# Altium PCB HOST.PcbDoc (part 2 of 2)
Units mil, origin at the board's own origin, x right, y up, seen from the top; angles counter-clockwise.
Board outline 6000 x 4000 mil, 2 copper layers (Top Layer, Bottom Layer); 110 components, 88 nets, 329 pads, 175 vias.
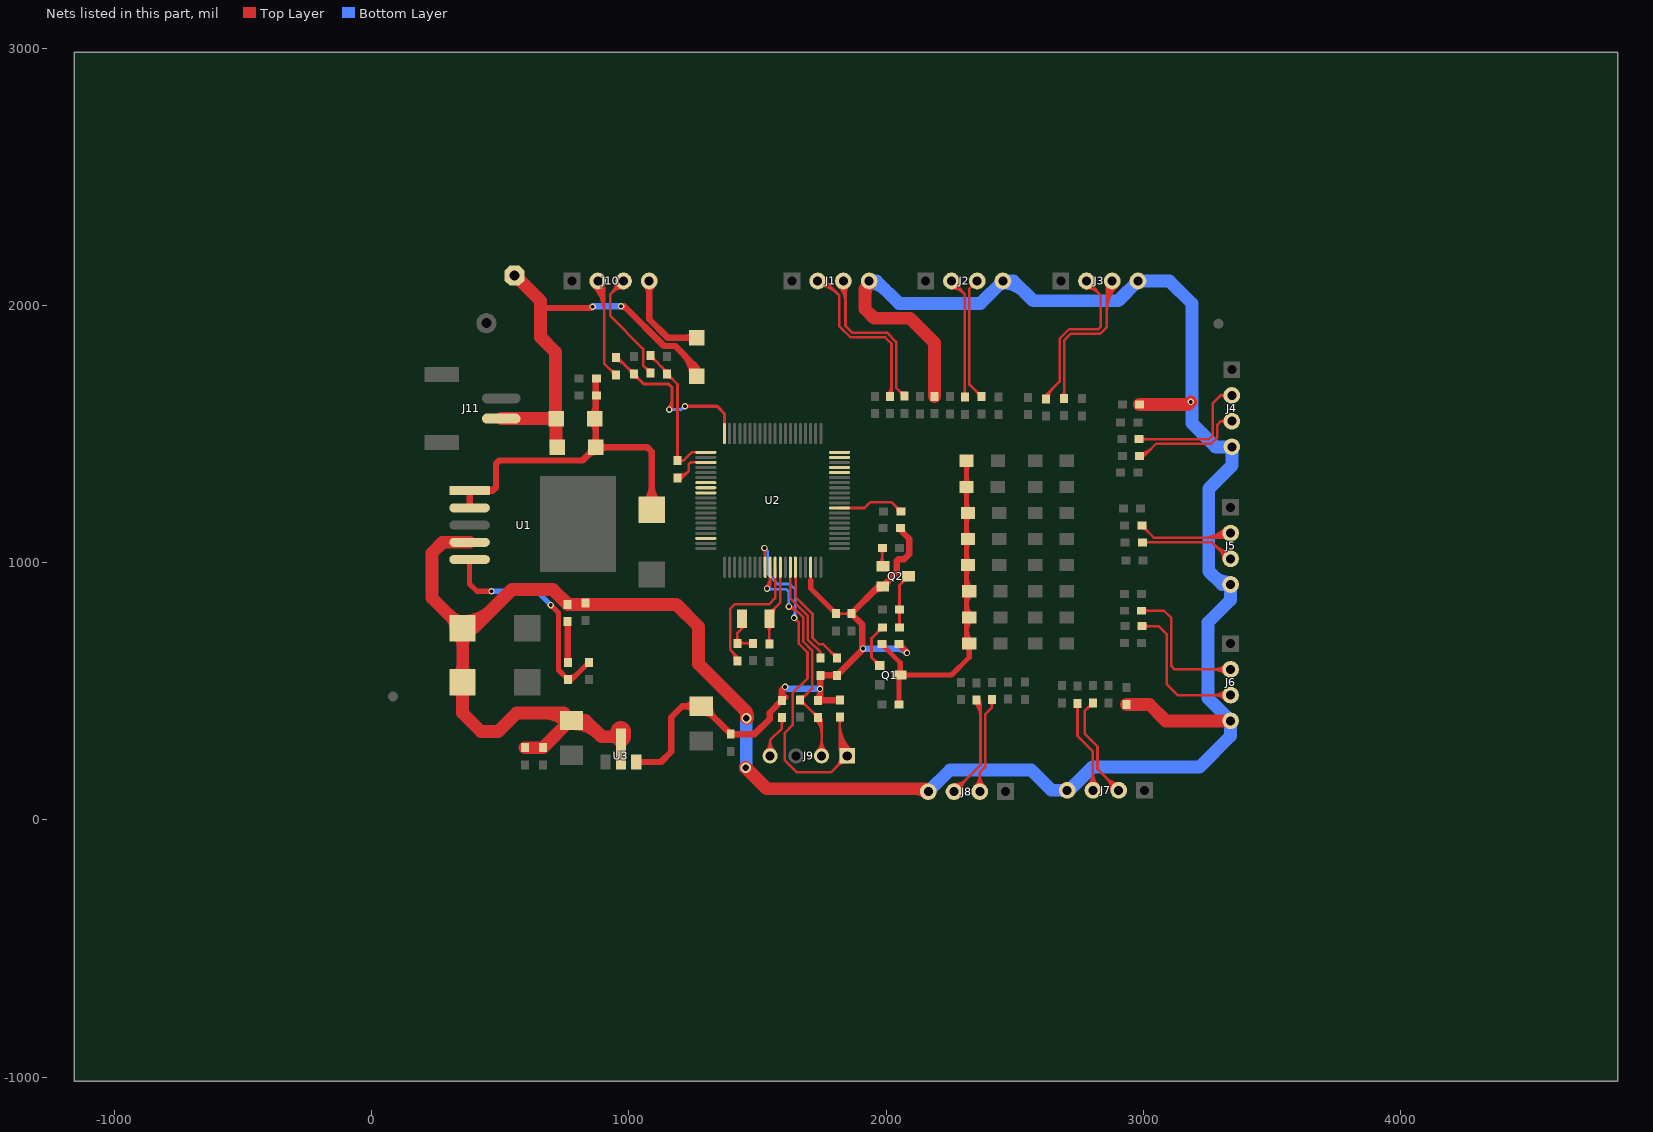
[diagram p2: the nets of this part, all layers, seen from the top]

## Via types
v1: diameter 25, hole 15, Top Layer to Bottom Layer, tented both sides, 173 vias
v2: diameter 40, hole 25, Top Layer to Bottom Layer, tented both sides, 2 vias

## Nets (pads, with @x,y where several pads share a name; then routed paths per layer and width w, separated by ;. In a path a pad name is that pad's centre, name@x,y a point inside that pad or via, vN(x,y) a via of type N, cw(c..) or ccw(c..) an arc to the next point about the centre after c; other vN are vias at no path point) (continued)
M_RXD: C27.2 R20.2 R28.1 U2.61 | length 793.3
  Top Layer w10: R28.1@1084,1792.5 cw(c1084,1762.32) 1105.34,1783.66 ; R28.1@1084,1805 1149,1740 C27.2@1149,1733.49 1189,1693.49 1189,1616 ; R28.1@1094.5,1803 ccw(c1115.02,1803) 1100.51,1788.49 ; 1127.89,1761.11 cw(c1102.27,1735.49) C27.2@1138.5,1735.49 ; C27.2@1138.77,1750.23 ccw(c1149,1760.45) C27.2@1149,1745.99 ; C27.2@1149,1720.99 cw(c1149,1690.81) 1170.34,1712.15 ; C27.2@1159.5,1731.49 ccw(c1180.02,1731.49) 1165.51,1716.98 ; R20.2@1181.58,1406.42 ccw(c1163.65,1424.35) 1189,1424.35 ccw(c1214.35,1424.35) R20.2@1196.42,1406.42 ; 1189,1641 1189,1616 ; R20.2@1196.93,1390.12 cw(c1212,1377.06) 1212,1397 ; R20.2@1196.93,1403.88 ccw(c1212,1416.94) 1212,1397 ; U2.61@1299.16,1429.01 1244.01,1429.01 1212,1397 ; 1189,1616 R20.2@1189,1397 1212,1397
M_TXD: C28.2 R29.2 U2.60 | length 903.4
  Top Layer w12: R29.2@949,1785.5 cw(c949,1742.07) 979.71,1772.78 ; R29.2@949,1797 955.49,1797 C28.2@1019,1733.49 1058.49,1694 1155,1694 1168,1681 1168,1606 v1(1157,1595) ; 999.37,1753.12 ccw(c1019,1772.75) C28.2@1019,1744.99 ; C28.2@1004.2,1748.29 cw(c991.39,1735.49) C28.2@1009.5,1735.49 ; C28.2@1019,1721.99 cw(c1019,1694.23) 1038.63,1713.86 ; C28.2@1028.5,1731.49 ccw(c1046.61,1731.49) C28.2@1033.8,1718.69 ; v1@1152.4,1599.6 ccw(c1114.75,1637.25) 1168,1637.25 ; v1@1160.89,1591.11 ccw(c1143.72,1608.28) 1168,1608.28 ; v1(1218,1608) 1343,1608 1371.97,1579.03 U2.60@1371.99,1501.84 ; v1@1222.6,1603.4 cw(c1233.69,1592.31) 1233.69,1608 cw(c1233.69,1623.69) v1@1222.6,1612.6
  Bottom Layer w12: v1(1157,1595) 1201,1595 1214,1608 v1(1218,1608) ; v1@1161.6,1590.4 cw(c1172.69,1579.31) 1172.69,1595 cw(c1172.69,1610.69) v1@1161.6,1599.6 ; 1200.08,1594.08 cw(c1218,1576.15) v1@1218,1601.5
MOTO_K1: U2.39
MOTO_POW: U2.40
NetC20_1: C20.1 C21.2 C22.2 F1.2 F2.2 U1.1 U1.2 | length 2166.8
  Top Layer w25: U1.2@380.82,1212.93 U1.1@380.82,1279.86 470.86,1279.86 483.49,1292.49 ; U1.1@443.85,1284.67 ccw(c457.84,1318.14) 483.49,1292.49 ; F1.2@853.5,1448 cw(c811.25,1448) 841.13,1418.13 cw(c871,1388.25) F1.2@871,1430.5 ; F2.2@854.63,1572.37 ccw(c815.09,1611.91) 871,1611.91 ; F2.2@867,1560 871,1556 F1.2@871,1448 ; 871,1592.59 ccw(c899.59,1592.59) F2.2@879.37,1572.37 ; C21.2@873.51,1715 871,1712.49 F1.2@871,1448 ; F1.2@883.37,1435.63 cw(c913.25,1405.75) 913.25,1448 cw(c913.25,1490.25) F1.2@883.37,1460.37 ; C20.1@1061.65,1233.34 ccw(c995.62,1299.37) 1089,1299.37 ccw(c1182.38,1299.37) C20.1@1116.35,1233.34 ; C20.1@1089,1205.98 1089,1431 1072,1448 F1.2@871,1448 ; 483.49,1292.49 483.49,1385 495.49,1397 820,1397 F1.2@871,1448 ; 871,1490.25 ccw(c913.25,1490.25) F1.2@883.37,1460.37 ; 871,1490.25 cw(c828.75,1490.25) 858.63,1460.37 ccw(c828.75,1490.25) 871,1490.25 ; 871,1490.25 ccw(c913.25,1490.25) F1.2@883.37,1460.37 ; F2.2@854.63,1547.63 cw(c815.09,1508.09) 871,1508.09 ccw(c815.09,1508.09) F2.2@854.63,1547.63 ; 871,1527.41 cw(c899.59,1527.41) 879.37,1547.63 ccw(c899.59,1527.41) 871,1527.41
NetC23_2: C23.2 R22.1 Y1.2 | length 304.7
  Top Layer w10: R22.1@1414.58,694.42 ccw(c1396.65,712.35) 1422,712.35 ccw(c1447.35,712.35) 1429.42,694.42 ccw(c1448.53,713.53) 1448.53,686.51 ; R22.1@1429.42,679.58 cw(c1446.16,662.84) 1446.16,686.51 ; Y1.2@1434.33,752.58 cw(c1431.23,744.7) 1439.7,744.7 ; Y1.2@1439.7,782 1439.7,744.7 ; Y1.2@1445.07,752.58 ccw(c1448.17,744.7) 1439.7,744.7 ; C23.2@1474.58,679.08 ccw(c1456.65,661.16) 1456.65,686.51 ccw(c1456.65,711.86) C23.2@1474.58,693.93 ; C23.2@1482,686.51 1423.51,686.51 R22.1@1422,685 1422,727 1439.7,744.7
NetC39_2: C39.2 D9.2 D10.2 D11.2 D12.2 D13.2 D14.2 D15.2 D16.2 Q1.C R31.2 | length 2154.2
  Top Layer w20: R31.2@1983,683 2055,611 Q1.C@2055,563 ; R31.2@1990.5,683 ccw(c2008.61,683) R31.2@1995.8,670.2 ; Q1.C@2042.34,557.34 cw(c2022.63,537.63) 2050.51,537.63 ; Q1.C@2049.34,568.66 ccw(c2035.69,582.31) 2055,582.31 ccw(c2074.31,582.31) Q1.C@2060.66,568.66 ; C39.2@2050.51,449 2050.51,558.51 Q1.C@2055,563 ; Q1.C@2067.66,557.34 cw(c2081.31,543.69) 2081.31,563 cw(c2081.31,582.31) Q1.C@2067.66,568.66 ; D10.2@2302.32,1284.94 cw(c2276.65,1259.27) 2312.95,1259.27 ; D10.2@2302.32,1304.2 ccw(c2276.65,1329.87) 2312.95,1329.87 ; D9.2@2303.32,1386.37 cw(c2280.07,1363.11) 2312.95,1363.11 cw(c2345.84,1363.11) D9.2@2322.59,1386.37 ; D13.2@2304.38,980.65 cw(c2283.7,959.97) 2312.95,959.97 ; D13.2@2304.38,999.92 ccw(c2283.7,1020.61) 2312.95,1020.61 ; D12.2@2304.38,1082.08 cw(c2283.7,1061.39) 2312.95,1061.39 ; D12.2@2304.38,1101.35 ccw(c2283.7,1122.03) 2312.95,1122.03 ; D11.2@2304.38,1183.51 cw(c2283.7,1162.82) 2312.95,1162.82 ; D11.2@2304.38,1202.77 ccw(c2283.7,1223.46) 2312.95,1223.46 ; 2312.95,733.52 ccw(c2366.54,733.52) D16.2@2328.65,695.63 ; 2312.95,739.9 cw(c2366.54,739.9) D15.2@2328.65,777.8 ; 2312.95,834.95 ccw(c2366.54,834.95) D15.2@2328.65,797.06 ; 2312.95,841.33 cw(c2366.54,841.33) D14.2@2328.65,879.22 ; 2312.95,936.38 ccw(c2366.54,936.38) D14.2@2328.65,898.49 ; 2312.95,954.83 cw(c2349.47,954.83) D13.2@2323.65,980.65 ; 2312.95,1025.74 ccw(c2349.47,1025.74) D13.2@2323.65,999.92 ; 2312.95,1056.26 cw(c2349.47,1056.26) D12.2@2323.65,1082.08 ; 2312.95,1127.17 ccw(c2349.47,1127.17) D12.2@2323.65,1101.35 ; 2312.95,1157.69 cw(c2349.47,1157.69) D11.2@2323.65,1183.51 ; 2312.95,1228.6 ccw(c2349.47,1228.6) D11.2@2323.65,1202.77 ; 2312.95,1264.1 cw(c2342.43,1264.1) D10.2@2321.59,1284.94 ; 2312.95,1325.04 ccw(c2342.43,1325.04) D10.2@2321.59,1304.2 ; D9.2@2312.95,1396 2312.95,1193.14 2312.95,696 D16.2@2322.95,686 2322.95,631.95 2254,563 Q1.C@2055,563 ; D16.2@2313.32,676.37 cw(c2290.07,653.11) 2322.95,653.11 cw(c2355.84,653.11) D16.2@2332.59,676.37
NetF3_1: F3.1 J10.4 | length 505.6
  Top Layer w25: J10.4@1064.86,2080.86 cw(c1030.72,2046.72) 1079,2046.72 cw(c1127.28,2046.72) J10.4@1093.14,2080.86 ; J10.4@1079,2095 1079,1946 1150,1875 F3.1@1264,1875 ; F3.1@1251.63,1862.63 ccw(c1221.75,1832.75) 1221.75,1875 ccw(c1221.75,1917.25) F3.1@1251.63,1887.37
NetJ1_2: J1.2 R3.1 | length 922.1
  Top Layer w10: J1.2@1734,2077.5 cw(c1734,1967.65) 1811.67,2045.33 ; J1.2@1734,2087.5 cw(c1734,2001.8) 1794.6,2062.4 ; J1.2@1734,2095 1762,2095 1818,2039 1818,1918.83 1860.63,1876.2 1996,1876.2 2021,1851.2 R3.1@2021,1646 ; J1.2@1734,2097.5 cw(c1734,2035.94) 1777.53,2079.47 ; R3.1@2006.91,1655.42 ccw(c1972.89,1689.44) 2021,1689.44 ; R3.1@2013.98,1648.35 ccw(c1997.03,1665.3) 2021,1665.3
NetJ1_3: J1.3 R1.2 | length 890.2
  Top Layer w10: J1.3@1814.55,2075.55 cw(c1748.3,2009.3) 1842,2009.3 ; J1.3@1821.63,2082.63 cw(c1772.44,2033.44) 1842,2033.44 ; J1.3@1828.7,2089.7 cw(c1796.58,2057.58) 1842,2057.58 ; J1.3@1834,2095 1842,2087 1842,1942 ; 1842,1972 1842,1942 ; 1842,2047.92 cw(c1881.08,2047.92) J1.3@1853.45,2075.55 ; 2050.33,1668.34 ccw(c2071.67,1689.68) R1.2@2071.67,1659.5 ; 2055.16,1663.51 cw(c2040.65,1649) R1.2@2061.17,1649 ; R1.2@2071.67,1647 2038.8,1679.87 2038.8,1858.57 2003.37,1894 1868,1894 1842,1920 1842,1942
NetJ2_2: J2.2 R4.1 | length 684
  Top Layer w10: J2.2@2254,2067.5 cw(c2254,2001.11) 2300.95,2048.05 cw(c2347.89,2095) J2.2@2281.5,2095 ; J2.2@2254,2077.5 cw(c2254,2035.25) 2283.87,2065.13 cw(c2313.75,2095) J2.2@2271.5,2095 ; J2.2@2254,2095 2306,2043 R4.1@2306,1643 ; R4.1@2298.58,1652.42 ccw(c2280.65,1670.35) 2306,1670.35 ccw(c2331.35,1670.35) R4.1@2313.42,1652.42
NetJ2_3: J2.3 R2.2 | length 521.9
  Top Layer w10: 2349.66,1666.34 ccw(c2371,1687.68) R2.2@2371,1657.5 ; J2.3@2354,2095 2323.8,2064.8 2323.8,1733 2323.8,1692.2 R2.2@2371,1645 ; 2354.49,1661.51 cw(c2339.98,1647) R2.2@2360.5,1647
NetJ3_2: J3.2 R7.1 | length 876.5
  Top Layer w10: R7.1@2622,1637 2622,1652 2674.2,1704.2 2674.2,1870.37 2711.93,1908.1 2825.1,1908.1 2835,1918 2835,2039 J3.2@2779,2095 ; R7.1@2622.5,1639 cw(c2655.09,1639) 2632.05,1662.05 ; R7.1@2632.5,1639 cw(c2689.23,1639) 2649.12,1679.12 ; J3.2@2779,2067.5 cw(c2779,2001.11) 2825.95,2048.05 cw(c2872.89,2095) J3.2@2806.5,2095 ; J3.2@2779,2077.5 cw(c2779,2035.25) 2808.87,2065.13 cw(c2838.75,2095) J3.2@2796.5,2095
NetJ3_3: J3.3 R5.2 | length 959.6
  Top Layer w10: R5.2@2684.58,1648.42 ccw(c2666.65,1666.35) 2692,1666.35 ccw(c2717.35,1666.35) R5.2@2699.42,1648.42 ; R5.2@2692,1639 2692,1863 2719.3,1890.3 2832.47,1890.3 2858,1915.83 2858,2074 J3.3@2879,2095 ; 2858,1977.91 cw(c2996.09,1977.91) J3.3@2898.45,2075.55 ; 2858,2002.05 cw(c2971.95,2002.05) J3.3@2891.37,2082.63 ; 2858,2026.19 cw(c2947.81,2026.19) J3.3@2884.3,2089.7 ; 2858,2050.34 cw(c2923.66,2050.34) J3.3@2877.23,2096.77
NetJ4_2: J4.2 R8.1 | length 593
  Top Layer w10: R8.1@2983,1480 3256,1480 3270,1494 3270,1620 3300,1650 ; R8.1@2992.42,1472.58 cw(c3010.35,1454.65) 3010.35,1480 cw(c3010.35,1505.35) R8.1@2992.42,1487.42 ; J4.2@3319.28,1637.95 ccw(c3300,1628.55) 3300,1650 ; J4.2@3319.28,1662.05 cw(c3300,1671.45) 3300,1650 ; J4.2@3344,1650 3300,1650
NetJ4_3: J4.3 R6.2 | length 582.6
  Top Layer w10: R6.2@2985,1415 3002.8,1415 ; R6.2@2987,1415.5 ccw(c2987,1454.85) 3014.83,1427.03 ; R6.2@2987,1425.5 ccw(c2987,1488.99) 3031.9,1444.1 ; R6.2@2996.68,1410.93 cw(c3002.8,1408.36) 3002.8,1415 ; R6.2@2996.68,1419.07 ccw(c3002.8,1421.64) 3002.8,1415 ; J4.3@3318.79,1539 ccw(c3302,1531.68) 3302,1550 ; J4.3@3318.79,1561 cw(c3302,1568.32) 3302,1550 ; J4.3@3344,1550 3302,1550 ; 3002.8,1415 3050,1462.2 3263.37,1462.2 3287.8,1486.63 3287.8,1535.8 3302,1550
NetJ5_2: J5.2 R11.1 | length 701.9
  Top Layer w10: R11.1@2994,1144 3041.2,1096.8 3320.8,1096.8 J5.2@3339,1115 ; R11.1@2996,1133.5 cw(c2996,1112.98) 3010.51,1127.49 ; R11.1@3006.5,1144 ccw(c3036.68,1144) 3015.34,1122.66 ; 3228.67,1096.8 ccw(c3228.67,1225.33) J5.2@3319.55,1134.45 ; 3252.81,1096.8 ccw(c3252.81,1201.19) J5.2@3326.63,1127.37 ; 3276.95,1096.8 ccw(c3276.95,1177.05) J5.2@3333.7,1120.3 ; 3301.1,1096.8 ccw(c3301.1,1152.9) J5.2@3340.77,1113.23
NetJ5_3: J5.3 R9.2 | length 562
  Top Layer w10: R9.2@2996,1079 3267,1079 3331,1015 J5.3@3339,1015 ; R9.2@3005.42,1071.58 cw(c3023.35,1053.65) 3023.35,1079 cw(c3023.35,1104.35) R9.2@3005.42,1086.42 ; 3278.4,1067.6 ccw(c3339,1128.2) J5.3@3339,1042.5 ; 3295.47,1050.53 ccw(c3339,1094.06) J5.3@3339,1032.5 ; 3297.71,1048.29 cw(c3264.42,1015) J5.3@3311.5,1015
NetJ6_2: J6.2 R12.1 | length 760
  Top Layer w10: R12.1@2993,813 3080,813 3108.8,784.2 3108.8,598 3121.8,585 J6.2@3339,585 ; R12.1@3002.42,805.58 cw(c3020.35,787.65) 3020.35,813 cw(c3020.35,838.35) R12.1@3002.42,820.42 ; J6.2@3319.55,565.55 ccw(c3272.61,518.61) 3272.61,585 ccw(c3272.61,651.39) J6.2@3319.55,604.45 ; J6.2@3326.63,572.63 ccw(c3296.75,542.75) 3296.75,585 ccw(c3296.75,627.25) J6.2@3326.63,597.37
NetJ6_3: J6.3 R10.2 | length 779.1
  Top Layer w10: R10.2@2995,753 3059,753 3091,721 3091,527 3133,485 J6.3@3339,485 ; R10.2@3004.42,745.58 cw(c3022.35,727.65) 3022.35,753 cw(c3022.35,778.35) R10.2@3004.42,760.42 ; J6.3@3319.55,465.55 ccw(c3272.61,418.61) 3272.61,485 ccw(c3272.61,551.39) J6.3@3319.55,504.45 ; J6.3@3326.63,472.63 ccw(c3296.75,442.75) 3296.75,485 ccw(c3296.75,527.25) J6.3@3326.63,497.37
NetJ7_2: J7.2 R15.1 | length 618.4
  Top Layer w10: 2782.66,433.66 cw(c2804,412.32) R15.1@2804,442.5 ; 2787.49,438.49 ccw(c2772.98,453) R15.1@2793.5,453 ; R15.1@2804,455 2772,423 2772,334.97 2821.8,285.17 2821.8,197.2 J7.2@2904,115 ; J7.2@2876.5,115 ccw(c2810.11,115) 2857.05,161.95 ccw(c2904,208.89) J7.2@2904,142.5 ; J7.2@2886.5,115 ccw(c2844.25,115) 2874.13,144.87 ccw(c2904,174.75) J7.2@2904,132.5
NetJ7_3: J7.3 R13.2 | length 574.7
  Top Layer w10: R13.2@2736.58,443.58 cw(c2718.65,425.65) 2744,425.65 cw(c2769.35,425.65) R13.2@2751.42,443.58 ; R13.2@2745,452 R13.2@2744,453 2744,326 2804,266 J7.3@2804,115 ; J7.3@2784.55,134.45 ccw(c2737.61,181.39) 2804,181.39 ccw(c2870.39,181.39) J7.3@2823.45,134.45 ; J7.3@2791.63,127.37 ccw(c2761.75,157.25) 2804,157.25 ccw(c2846.25,157.25) J7.3@2816.37,127.37
NetJ8_2: J8.2 R16.1 | length 587.9
  Top Layer w10: J8.2@2344.55,129.45 ccw(c2297.61,176.39) 2364,176.39 ccw(c2430.39,176.39) J8.2@2383.45,129.45 ; J8.2@2351.63,122.37 ccw(c2321.75,152.25) 2364,152.25 ccw(c2406.25,152.25) J8.2@2376.37,122.37 ; J8.2@2364,110 2364,184.83 2384.8,205.63 2384.8,409.8 2411,436 R16.1@2411,468 ; R16.1@2403.58,458.58 cw(c2385.65,440.65) 2411,440.65 cw(c2436.35,440.65) R16.1@2418.42,458.58
NetJ8_3: J8.3 R14.2 | length 740
  Top Layer w10: J8.3@2264,110 2367,213 2367,450 R14.2@2351,466 ; J8.3@2264,127.5 ccw(c2264,169.75) 2293.87,139.87 ccw(c2323.75,110) J8.3@2281.5,110 ; J8.3@2264,137.5 ccw(c2264,203.89) 2310.95,156.95 ccw(c2357.89,110) J8.3@2291.5,110 ; R14.2@2343.58,456.58 cw(c2287.02,400.02) 2367,400.02 ; R14.2@2350.65,463.65 cw(c2311.17,424.17) 2367,424.17 ; R14.2@2352.92,453.68 cw(c2356.02,437.02) 2368,449 ; R14.2@2357.72,470.72 cw(c2335.31,448.31) 2367,448.31 ; R14.2@2361.5,464 ccw(c2382.02,464) 2367.51,449.49
NetJ9_4: J9.4 R27.2 | length 356
  Top Layer w10: J9.4@1531.66,266.34 ccw(c1489.79,308.21) 1549,308.21 ccw(c1608.21,308.21) J9.4@1566.34,266.34 ; J9.4@1538.73,259.27 ccw(c1513.93,284.07) 1549,284.07 ccw(c1584.07,284.07) J9.4@1559.27,259.27 ; J9.4@1549,249 1549,310 1595,356 R27.2@1595,398 ; R27.2@1587.58,388.58 cw(c1569.65,370.65) 1595,370.65 cw(c1620.35,370.65) R27.2@1602.42,388.58
NetJ10_2: J10.2 R29.1 | length 840.1
  Top Layer w10: J10.2@859.55,2075.55 cw(c752.25,1968.25) 904,1968.25 ; J10.2@866.63,2082.63 cw(c776.4,1992.4) 904,1992.4 ; J10.2@873.7,2089.7 cw(c800.54,2016.54) 904,2016.54 ; J10.2@879,2095 904,2070 904,1775 R29.1@949,1730 ; J10.2@880.77,2096.77 cw(c824.68,2040.68) 904,2040.68 ; J10.2@887.84,2103.84 cw(c848.82,2064.82) 904,2064.82 ; 927.66,1751.34 ccw(c949,1772.68) R29.1@949,1742.5 ; 932.49,1746.51 cw(c917.98,1732) R29.1@938.5,1732
NetJ10_3: J10.3 R28.2 | length 653.2
  Top Layer w10: J10.3@951.5,2095 cw(c885.11,2095) 932.05,2048.05 cw(c979,2001.11) J10.3@979,2067.5 ; J10.3@961.5,2095 cw(c919.25,2095) 949.13,2065.13 cw(c979,2035.25) J10.3@979,2077.5 ; J10.3@979,2095 928,2044 928,1959 1055.7,1831.3 1055.7,1766.3 R28.2@1084,1738 ; 1062.66,1759.34 ccw(c1084,1780.68) R28.2@1084,1750.5 ; 1067.49,1754.51 cw(c1052.98,1740) R28.2@1073.5,1740
NetQ1_B: Q1.B R32.1 | length 267.8
  Top Layer w10: Q1.B@1962,600 ccw(c1930.62,600) 1952.81,622.19 ccw(c1975,644.38) Q1.B@1975,613 ; 1963.66,726.66 ccw(c1942.32,748) R32.1@1972.5,748 ; 1968.49,731.49 cw(c1983,716.98) R32.1@1983,737.5 ; Q1.B@1975,600 1943,632 1943,706 R32.1@1985,748
NetQ2_2: Q2.2 R34.2 | length 168.5
  Top Layer w10: Q2.2@1972.19,996.97 ccw(c1941.28,1027.88) 1985,1027.88 ; R34.2@1977.58,1049.58 cw(c1959.65,1031.65) 1985,1031.65 cw(c2010.35,1031.65) R34.2@1992.42,1049.58 ; 1985,1017.26 ccw(c2013.7,1017.26) Q2.2@1993.41,996.97 ; R34.2@1985,1057 1985,989.16 Q2.2@1987.8,986.36
NetQ2_3: Q2.3 R32.2 R33.2 | length 387.2
  Top Layer w10: R32.2@2044.58,755.42 ccw(c2026.65,773.35) 2052,773.35 ccw(c2077.35,773.35) R32.2@2059.42,755.42 ; R33.2@2044.58,810.58 cw(c2026.65,792.65) 2052,792.65 cw(c2077.35,792.65) R33.2@2059.42,810.58 ; R33.2@2044.58,825.42 ccw(c2026.65,843.35) 2052,843.35 ccw(c2077.35,843.35) R33.2@2059.42,825.42 ; R32.2@2052,748 R33.2@2052,818 2052,912 Q2.3@2087,947 ; 2054.5,914.5 ccw(c2024.22,944.78) Q2.3@2067.01,946.42 ; 2064.93,924.93 cw(c2082,907.86) Q2.3@2082,932
NetR18_1: R18.1 R36.2 | length 159.8
  Top Layer w25: R18.1@762,771 762,614 R36.2@764,612
NetR19_2: R19.2 R36.1 U1.5 | length 966.7
  Top Layer w20: U1.5@375.36,1006.69 cw(c362.19,993.51) 380.82,993.51 cw(c399.45,993.51) U1.5@386.28,1006.69 ; U1.5@380.82,1012.14 380.82,917.18 409,889 v1(466,889) ; v1(696,835) 726,805 726,583 R36.1@764,545 777,545 R19.2@844,612 ; R36.1@751.2,557.8 ccw(c764,570.61) 764,552.5 ccw(c764,601.99) 799,567 ; R19.2@831.2,599.2 cw(c844,586.39) R19.2@844,604.5
  Bottom Layer w20: v1(466,889) 642,889 v1(696,835)
NetR20_1: R20.1 U2.63 | length 268.6
  Top Layer w10: R20.1@1187.24,1322.66 ccw(c1190.97,1342.46) 1205.22,1328.22 ; R20.1@1189,1330 1207,1330 ; R20.1@1189.09,1332.49 ccw(c1195.22,1365) 1218.61,1341.61 ; R20.1@1190.94,1342.32 ccw(c1199.46,1387.53) 1232,1355 ; R20.1@1198.14,1324.83 cw(c1207,1319.82) 1207,1330 ; R20.1@1198.14,1335.17 ccw(c1207,1340.18) 1207,1330 ; U2.63@1299.16,1389.64 1239.64,1389.64 1232,1382 1232,1355 ; 1207,1330 1232,1355
NetR21_2: R21.2 U2.29 | length 301.4
  Top Layer w10: U2.29@1818.84,1212.47 1916.47,1212.47 1938,1234 2022,1234 R21.2@2057,1199 ; 2035.66,1220.34 cw(c2014.32,1199) R21.2@2044.5,1199 ; 2040.49,1215.51 ccw(c2055,1230.02) R21.2@2055,1209.5
NetR25_1: R25.1 U2.14 | length 430
  Top Layer w10: U2.14@1627.9,982.16 1627.9,861.27 1695.9,793.26 1695.9,699.93 1744,651.83 ; R25.1@1737.76,639.44 ccw(c1728.6,651.83) 1744,651.83 ; R25.1@1744,629 1744,651.83 ; R25.1@1750.24,639.44 cw(c1759.4,651.83) 1744,651.83
NetR26_1: R26.1 U2.15 | length 469.8
  Top Layer w10: U2.15@1647.58,982.16 1648.56,981.18 1648.56,865.77 1713.7,800.64 1713.7,707.3 1738,683 1755,683 R26.1@1809,629 ; 1787.66,650.34 ccw(c1809,671.68) R26.1@1809,641.5 ; 1792.49,645.51 cw(c1777.98,631) R26.1@1798.5,631
OPEN: U2.37
RESET: C26.2 J9.2 R24.2 U2.10 | length 1517.9
  Top Layer w10: v1@1531.7,904.3 ccw(c1489.54,946.46) U2.10@1549.16,946.46 ; v1(1537,899) 1549.16,911.16 U2.10@1549.16,982.16 ; v1@1538.77,897.23 ccw(c1513.68,922.32) 1549.16,922.32 ; v1@1622,821.5 cw(c1622,772.03) 1656.98,807.01 ; v1(1622,829) 1634.99,829 ; v1@1622,831.5 cw(c1622,806.17) 1639.91,824.08 ; v1@1626.77,823.21 cw(c1633.74,814.76) 1641.48,822.51 ; v1@1628.5,825.25 cw(c1634.99,821.5) 1634.99,829 ; v1@1628.5,832.75 ccw(c1634.99,836.5) 1634.99,829 ; C26.2@1665,454.01 cw(c1665,420.23) 1688.88,444.12 ; C26.2@1665,466.51 C26.2@1666.49,466.51 ; C26.2@1665,479.01 ccw(c1665,517.66) 1692.33,490.33 ; C26.2@1675.5,464.51 ccw(c1692.42,464.51) C26.2@1680.46,452.54 ; C26.2@1675.5,468.51 cw(c1687.55,468.51) C26.2@1679.03,477.03 ; 1713.66,419.34 ccw(c1735,440.68) R24.2@1735,410.5 ; 1718.49,414.51 cw(c1703.98,400) R24.2@1724.5,400 ; R24.2@1727.58,388.58 cw(c1675.85,336.85) 1749,336.85 ; J9.2@1731.66,266.34 ccw(c1689.79,308.21) 1749,308.21 ccw(c1808.21,308.21) J9.2@1766.34,266.34 ; R24.2@1734.65,395.65 cw(c1699.99,360.99) 1749,360.99 ; J9.2@1738.73,259.27 ccw(c1713.93,284.07) 1749,284.07 ccw(c1784.07,284.07) J9.2@1759.27,259.27 ; R24.2@1741.72,402.72 cw(c1724.14,385.14) R24.2@1749,385.14 ; J9.2@1749,249 1749,384 R24.2@1735,398 C26.2@1666.49,466.51 ; 1634.99,829 1678.1,785.89 1678.1,692.55 1712,658.65 1712,510 1668.51,466.51 C26.2@1666.49,466.51
  Bottom Layer w10: v1@1539,897 1610,897 1622,885 v1(1622,829) ; v1@1542.3,893.7 cw(c1550.28,885.72) 1550.28,897 ; v1@1542.3,904.3 ccw(c1559.93,921.93) 1559.93,897 ; v1@1616.7,834.3 ccw(c1603.89,847.11) 1622,847.11 ccw(c1640.11,847.11) v1@1627.3,834.3
RF_LVDIN: U2.78
SLEEP: U2.36
TOOL0: J9.1 R23.1 U2.9 | length 2224.5
  Top Layer w10: v1@1521.7,1051.7 cw(c1505.29,1035.29) 1528.49,1035.29 ; v1(1527,1057) 1528.49,1055.51 1528.49,983.14 U2.9@1529.47,982.16 ; 1528.49,1042.5 cw(c1541.5,1042.5) v1@1532.3,1051.7 ; v1@1642,777.5 cw(c1642,754.57) 1658.22,770.78 ; v1(1642,785) 1644,785 1660.3,768.7 1660.3,685.18 1694.2,651.28 1694.2,550.2 1636.7,492.7 1636.7,368.7 1606.67,338.67 1606.67,231.47 1629,209.14 1653.14,185 1664,185 1719,185 1785,185 J9.1@1849,249 1820,278 R23.1@1820,400 ; v1@1649.5,785 ccw(c1662.78,785) 1653.39,775.61 ; R23.1@1812.58,390.58 cw(c1794.65,372.65) 1820,372.65 cw(c1845.35,372.65) R23.1@1827.42,390.58 ; 1820,281.66 ccw(c1881.66,281.66) J9.1@1838.06,238.06 ; 1820,305.8 ccw(c1905.8,305.8) J9.1@1845.13,245.13 ; 1820,329.94 ccw(c1929.94,329.94) J9.1@1852.2,252.2 ; 1820,354.08 ccw(c1954.08,354.08) J9.1@1859.27,259.27 ; 1820,378.23 ccw(c1978.23,378.23) J9.1@1866.34,266.34 ; J9.1@1824.47,249 cw(c1765.26,249) 1807.13,207.13 cw(c1849,165.26) J9.1@1849,224.47 ; J9.1@1834.47,249 cw(c1799.4,249) 1824.2,224.2 cw(c1849,199.4) J9.1@1849,234.47
  Bottom Layer w10: v1@1527,1049.5 cw(c1527,1031.39) 1539.8,1044.2 cw(c1552.61,1057) v1@1534.5,1057 ; v1(1527,1057) 1540,1044 1540,955 1578,917 1625,917 1647.3,894.7 1647.3,790.3 v1(1642,785) ; v1@1636.7,790.3 ccw(c1611.1,815.9) 1647.3,815.9
VCC: C29.1 C33.2 C34.1 C35.1 Q2.1 R23.2 R24.1 R25.2 R26.2 R27.1 R30.1 R31.1 U2.18 U3.3 | length 3065.6
  Top Layer w10: U2.18@1706.64,982.16 1707,981.8 1707,932.52 ; C34.1@1805,801.49 C35.1@1865,801.49 ; C34.1@1812.42,794.07 cw(c1830.35,776.14) 1830.35,801.49 cw(c1830.35,826.84) C34.1@1812.42,808.92 ; C35.1@1857.58,794.07 ccw(c1839.65,776.14) 1839.65,801.49 ccw(c1839.65,826.84) C35.1@1857.58,808.92
  Top Layer w20: 1707,932.52 1707,899.49 C34.1@1805,801.49 ; C34.1@1792.2,814.29 ccw(c1805,827.1) C34.1@1805,808.99
  Top Layer w25: U3.3@1029,225 1125,225 1165,265 1165,399 1208,442 C29.1@1281,442 1287.51,442 C33.2@1396,333.51 1488.51,333.51 1547,392 1547,417 R27.1@1595,465 ; C29.1@1255.82,424.32 ccw(c1213.14,381.64) 1213.14,442 ccw(c1213.14,502.36) C29.1@1255.82,459.68 ; C29.1@1288.5,417 cw(c1288.5,359.04) 1329.49,400.02 ; C29.1@1313.5,442 ccw(c1376.25,442) 1331.88,397.63 ; 1595,488.03 cw(c1635.97,488.03) v1(1607,517) 1595,505 R27.1@1595,465 ; R27.1@1607,477 R27.1@1595,465 ; R24.1@1732.88,469.12 ccw(c1706.03,495.97) 1744,495.97 ; R23.2@1820,467 1818,465 R24.1@1735,465 1744,474 R25.2@1744,562 R26.2@1809,562 1908,661 v1@1908,664 ; v1(1910,666) v1@1908,664 ; 1949.58,886.07 cw(c1982,853.65) Q2.1@1982,899.5 ; Q2.1@1999.5,907 cw(c2029.68,907) 2008.34,928.34 ; R31.1@2050,683 2081,652 v1(2081,649) ; R30.1@2055,1134 2055,1127.6 2089.8,1092.8 2089.8,1033.09 2070.71,1014 2049,1014 2041.7,1006.7 2041.7,961.7 Q2.1@1987,907 1970.51,907 C35.1@1865,801.49 1908,758.49 v1@1908,664 ; R30.1@2060,1134 ccw(c2087.52,1134) 2068.06,1114.54
  Bottom Layer w25: v1(1607,517) ccw(c1626.31,536.31) 1626.31,509 ; v1@1615,509 v1(1743,509) ; v1(1910,666) 2064,666 v1(2081,649) ccw(c2039.96,607.96) 2039.96,666
VIN: F1.1 F2.1 F3.2 J11.1 VIN.1 | length 1916.2
  Top Layer w25: 657,1990 854,1990 v1(859,1995) cw(c846.93,2007.07) 846.93,1990 ; 989.83,1988.79 ccw(c970,1968.96) v1(970,1997) 981.61,1997 1136.41,1842.2 1179.8,1842.2 1264,1758 ; 1210.79,1811.21 cw(c1124.58,1725) F3.2@1246.5,1725 ; 1253.47,1768.53 cw(c1209.94,1725) F3.2@1271.5,1725 ; F3.2@1254.18,1739.49 ccw(c1241.64,1758) 1264,1758 ; F3.2@1264,1725 1264,1758 ; F3.2@1273.82,1739.49 cw(c1286.36,1758) 1264,1758
  Top Layer w50: J11.1@504,1560 F2.1@717,1560 ; VIN.1@555.19,2115.95 557.79,2115.95 657,2016.74 657,1990 657,1876 714.7,1818.3 714.7,1562.3 F2.1@717,1560 ; F1.1@721,1448 717,1452 F2.1@717,1560
  Bottom Layer w25: v1(859,1995) 861,1997 v1(970,1997)
VOUT: C17.1 C18.1 C19.2 C30.2 C31.2 C32.1 C36.2 C37.2 C38.2 J1.4 J2.4 J3.4 J4.4 J5.4 J6.4 J7.4 J8.4 R18.2 U1.4 U3.2 | length 11406.2
  Top Layer w50: C18.1@326.83,745 ccw(c263.63,745) 308.32,789.69 ccw(c353.02,834.39) 353.02,771.18 ccw(c353.02,935.75) 469.38,819.38 ; C17.1@334.5,516.49 cw(c289.81,471.79) 353.02,471.79 cw(c416.22,471.79) C17.1@371.53,516.49 ; C17.1@334.5,553.51 ccw(c287.39,600.62) 354.02,600.62 ; C18.1@334.5,726.49 cw(c287.39,679.38) 354.02,679.38 ; C17.1@352.02,581 354.02,583 C18.1@354.02,745 ; C17.1@353.02,535 353.02,415.98 425,344 492,344 563,415 748,415 C32.1@777,386 ; 354.02,595.79 ccw(c413.81,595.79) C17.1@371.53,553.51 ; 354.02,684.21 cw(c413.81,684.21) C18.1@371.53,726.49 ; U1.4@380.82,1079.07 276.07,1079.07 235,1038 235,959 235,926.02 235,863.02 C18.1@353.02,745 C18.1@354.02,745 ; C30.2@596,280.51 C31.2@666,280.51 771.49,386 C32.1@777,386 ; 669.31,415 cw(c669.31,285.81) C32.1@760.66,377.16 ; C32.1@784.5,373.5 cw(c784.5,231.06) 885.22,331.78 ; C32.1@789.63,374.6 cw(c813.35,321.86) 854.25,362.75 ; U3.2@950.51,322.98 ccw(c950.51,354.13) U3.2@972.54,332.1 ; U3.2@969,322.98 894.02,322.98 831,386 C32.1@777,386 ; 1447.86,429.14 cw(c1413.72,395) v2@1462,395 ; v2(1454,203) 1536,121 2153,121 J8.4@2164,110 ; v2(1457,395) 1457,420 1270.3,606.7 1270.3,752 1184.3,838 R18.2@762,838 705,895 545,895 395,745 C18.1@354.02,745 ; 1917.7,2037.54 cw(c1991.46,2037.54) J1.4@1939.3,2089.7 ; J1.4@1934,2095 1934,2080.36 1917.7,2064.06 1917.7,1986.3 1954,1950 2093,1950 2188.33,1854.67 C37.2@2188.33,1646.51 ; 2119.34,121 cw(c2119.34,65.34) J8.4@2158.7,104.7 ; C36.2@2934,448.49 3023.51,448.49 3087,385 J6.4@3339,385 ; C38.2@2985.51,1615 3174,1615 v1(3184,1625)
  Bottom Layer w50: v2(1454,203) 1456,205 1456,395 v2(1457,395) ; v2@1457,200 v2@1457,203 ; J1.4@1934,2087.5 cw(c1934,1999.38) 1996.31,2061.69 ; J1.4@1934,2095 1963,2095 2050,2008 2367,2008 J2.4@2454,2095 2495,2095 2572,2018 2902,2018 J3.4@2979,2095 3101,2095 3189,2007 3189,1542 3281,1450 J4.4@3344,1450 3344,1377 3254,1287 3254,967 3306,915 J5.4@3339,915 3339,855 3251,767 3251,473 J6.4@3339,385 3339,326 3218,205 2801.65,205 2711.65,115 J7.4@2704,115 2643,115 2564,194 2248,194 J8.4@2164,110 ; J2.4@2454,2087.5 cw(c2454,1970.41) 2536.79,2053.21 ; J2.4@2456.49,2087.92 cw(c2475.33,2034.33) 2515.5,2074.5 ; 3270.5,950.5 ccw(c3338.1,1018.1) J5.4@3338.93,922.5
WY_POW: U2.67
WY_SCL: U2.69
WY_SDA: U2.68
XT1: C24.2 U2.12 Y1.1 | length 467.5
  Top Layer w10: Y1.1@1535.62,755.87 cw(c1510.55,730.8) 1546,730.8 cw(c1581.45,730.8) Y1.1@1556.38,755.87 ; C24.2@1538.58,692.93 ccw(c1520.65,710.86) 1546,710.86 ccw(c1571.35,710.86) C24.2@1553.42,692.93 ; C24.2@1546,683.51 Y1.1@1546,782 1546,802 1588.53,844.53 U2.12@1588.53,982.16 ; Y1.1@1546,812.43 ccw(c1546,837.62) 1563.81,819.81 ; Y1.1@1560.68,797.75 cw(c1606.4,797.75) 1574.08,830.08
XT2: R22.2 U2.11 | length 599.7
  Top Layer w10: 1394.25,661.65 cw(c1352.6,620) R22.2@1411.5,620 ; 1411.32,644.58 cw(c1386.74,620) R22.2@1421.5,620 ; R22.2@1422,618 1422,633.9 1393.7,662.2 1393.7,819.7 1413,839 1545.73,839 1568.84,862.11 U2.11@1568.84,982.16
pads on no net: U2.1 U2.2 U2.3 U2.4 U2.5 U2.7 U2.8 U2.13 U2.16 U2.19 U2.20 U2.21 U2.22 U2.23 U2.24 U2.25 U2.26 U2.30 U2.32 U2.33 U2.34 U2.35 U2.41 U2.49 U2.50 U2.51 U2.52 U2.53 U2.54 U2.55 U2.56 U2.62 U2.64 U2.70 U2.71 U2.72 U2.79 U2.80

## Polygon pours and split planes (outlines as drawn)
GND on Bottom Layer "Top Layer-No Net" (solid, remove dead copper, pour order 1000): -67,-124 3582,-124 3600,-106 3600,2216 -17,2216 -58,2175 -58,-107 -54,-111
GND on Top Layer "Top Layer-No Net" (solid, remove dead copper, pour order 1001): -48,2193 -49,2192 -49,-109 3582,-109 3590,-117 3590,2198 3594,2202 3585,2193 -48,2193

## Keep-outs
Keep-Out Layer:
  circle w10: c137.01,2075 r62.99
  circle w10: c110.01,114 r62.99
  circle w10: c3337.2,124.97 r62.99
  circle w10: c3335.01,2096 r62.99
  lines w5: -1,2052 -1,2203 3445,2203 3453,2195 3453,2064 ; -1,2077 -1,1 0,0 198,0 ; 114,0 3453,0 3453,2074

## Other copper
Top Layer:
  rectangle net GND: 165,1669 379,1806
  rectangle net GND: 170,1390 387,1530

## Silkscreen, mask and mechanical layers (free items; w line width, h text height)
Top Overlay:
  lines w4: 266.42,205.49 306.42,205.49 ; 266.42,209.49 302.42,209.49 ; 266.42,213.49 298.42,213.49 ; 266.42,217.49 302.42,217.49 ; 270.42,197.49 314.42,197.49 ; 270.42,201.49 310.42,201.49 ; 270.42,221.49 306.42,221.49 ; 270.42,225.49 310.42,225.49 ; 274.42,193.49 318.42,193.49 ; 274.42,229.49 314.42,229.49 ; 274.42,233.49 318.42,233.49 ; 278.42,189.49 322.42,189.49 ; 278.42,237.49 322.42,237.49 ; 282.42,185.49 326.42,185.49 ; 282.42,241.49 326.42,241.49 ; 286.42,181.49 330.42,181.49 ; 286.42,245.49 330.42,245.49 ; 290.42,177.49 334.42,177.49 ; 290.42,249.49 334.42,249.49 ; 294.42,173.49 338.42,173.49 ; 294.42,253.49 338.42,253.49 ; 298.42,169.49 342.42,169.49 ; 298.42,257.49 342.42,257.49 ; 302.42,165.49 346.42,165.49 ; 302.42,261.49 346.42,261.49 ; 306.42,161.49 350.42,161.49 ; 306.42,265.49 350.42,265.49 ; 310.42,157.49 354.42,157.49 ; 310.42,269.49 354.42,269.49 ; 314.42,153.49 358.42,153.49 ; 314.42,273.49 358.42,273.49 ; 318.42,149.49 362.42,149.49 ; 318.42,277.49 362.42,277.49 ; 322.42,145.49 366.42,145.49 ; 322.42,281.49 366.42,281.49 ; 326.42,141.49 370.42,141.49 ; 326.42,285.49 370.42,285.49 ; 330.42,137.49 374.42,137.49 ; 330.42,289.49 374.42,289.49 ; 334.42,133.49 378.42,133.49 ; 334.42,293.49 378.42,293.49 ; 338.42,129.49 382.42,129.49 ; 338.42,297.49 382.42,297.49 ; 342.42,125.49 430.42,125.49 ; 342.42,213.49 386.42,213.49 ; 342.42,301.49 426.42,301.49 ; 346.42,121.49 426.42,121.49 ; 346.42,209.49 386.42,209.49 ; 346.42,217.49 390.42,217.49 ; 346.42,305.49 422.42,305.49 ; 350.42,117.49 422.42,117.49 ; 350.42,205.49 390.42,205.49 ; 350.42,221.49 394.42,221.49 ; 350.42,309.49 418.42,309.49 ; 354.42,113.49 418.42,113.49 ; 354.42,201.49 394.42,201.49 ; 354.42,225.49 398.42,225.49 ; 354.42,313.49 414.42,313.49 ; 358.42,109.49 414.42,109.49 ; 358.42,197.49 398.42,197.49 ; 358.42,229.49 402.42,229.49 ; 358.42,317.49 410.42,317.49 ; 362.42,105.49 410.42,105.49 ; 362.42,193.49 402.42,193.49 ; 362.42,233.49 406.42,233.49 ; 362.42,321.49 406.42,321.49 ; 366.42,101.49 406.42,101.49 ; 366.42,189.49 406.42,189.49 ; 366.42,237.49 410.42,237.49 ; 368.42,240.49 412.42,240.49 ; 370.42,97.49 398.42,97.49 ; 370.42,185.49 402.42,185.49 ; 370.42,242.49 414.42,242.49 ; 370.42,325.49 402.42,325.49 ; 374.42,181.49 398.42,181.49 ; 374.42,245.49 418.42,245.49 ; 378.42,177.49 394.42,177.49 ; 378.42,249.49 422.42,249.49 ; 378.42,329.49 390.42,329.49 ; 382.42,173.49 390.42,173.49 ; 382.42,253.49 426.42,253.49 ; 386.42,257.49 430.42,257.49 ; 386.42,297.49 430.42,297.49 ; 390.42,129.49 434.42,129.49 ; 390.42,293.49 434.42,293.49 ; 391.42,261.49 435.42,261.49 ; 394.42,133.49 438.42,133.49 ; 394.42,265.49 438.42,265.49 ; 394.42,289.49 438.42,289.49 ; 398.42,137.49 442.42,137.49 ; 398.42,269.49 442.42,269.49 ; 398.42,285.49 442.42,285.49 ; 402.42,141.49 446.42,141.49 ; 402.42,273.49 446.42,273.49 ; 402.42,281.49 446.42,281.49 ; 406.42,145.49 450.42,145.49 ; 406.42,277.49 450.42,277.49 ; 410.42,149.49 454.42,149.49 ; 414.42,153.49 458.42,153.49 ; 418.42,157.49 462.42,157.49 ; 422.42,161.49 466.42,161.49 ; 426.42,165.49 470.42,165.49 ; 426.42,209.49 510.42,209.49 ; 430.42,169.49 466.42,169.49 ; 430.42,205.49 466.42,205.49 ; 430.42,213.49 466.42,213.49 ; 434.42,173.49 462.42,173.49 ; 434.42,201.49 462.42,201.49 ; 434.42,217.49 462.42,217.49 ; 438.42,177.49 458.42,177.49 ; 438.42,197.49 458.42,197.49 ; 438.42,221.49 458.42,221.49 ; 442.42,181.49 454.42,181.49 ; 442.42,193.49 454.42,193.49 ; 442.42,225.49 454.42,225.49 ; 446.42,185.49 450.42,185.49 ; 446.42,189.49 450.42,189.49 ; 446.42,229.49 450.42,229.49 ; 470.42,253.49 510.42,253.49 ; 474.42,205.49 510.42,205.49 ; 474.42,213.49 510.42,213.49 ; 474.42,249.49 510.42,249.49 ; 474.42,257.49 510.42,257.49 ; 478.42,201.49 506.42,201.49 ; 478.42,217.49 506.42,217.49 ; 478.42,245.49 506.42,245.49 ; 478.42,261.49 502.42,261.49 ; 482.42,197.49 502.42,197.49 ; 482.42,221.49 502.42,221.49 ; 482.42,241.49 502.42,241.49 ; 482.42,265.49 498.42,265.49 ; 486.42,193.49 498.42,193.49 ; 486.42,225.49 498.42,225.49 ; 486.42,237.49 498.42,237.49 ; 486.42,269.49 494.42,269.49 ; 490.42,189.49 494.42,189.49 ; 490.42,229.49 494.42,229.49 ; 490.42,233.49 494.42,233.49
  text "WX0.000.747" at 933,651 h32
  text "2017.08.24" at 935,598 h32
  text "V1.0.1" at 940,553 h32
  text "designed by cc" at 640,25 h32
  text "VIEWSHINE" at 228.42,15.49 h70.01

## Text inside footprints (layer, text, board x,y; h text height)
VIN: Top Overlay "V-" at 441.13,1984.02 h32 r90; Top Overlay "V+" at 507.96,2090.37 h32 r90